# Altium PCB SMD final PCB.PcbDoc
Units mm, origin at the board's own origin, x right, y up, seen from the top; angles counter-clockwise.
Board outline 85 x 85 mm, 2 copper layers (Top Layer, Bottom Layer); 34 components, 28 nets, 140 pads, 61 vias.
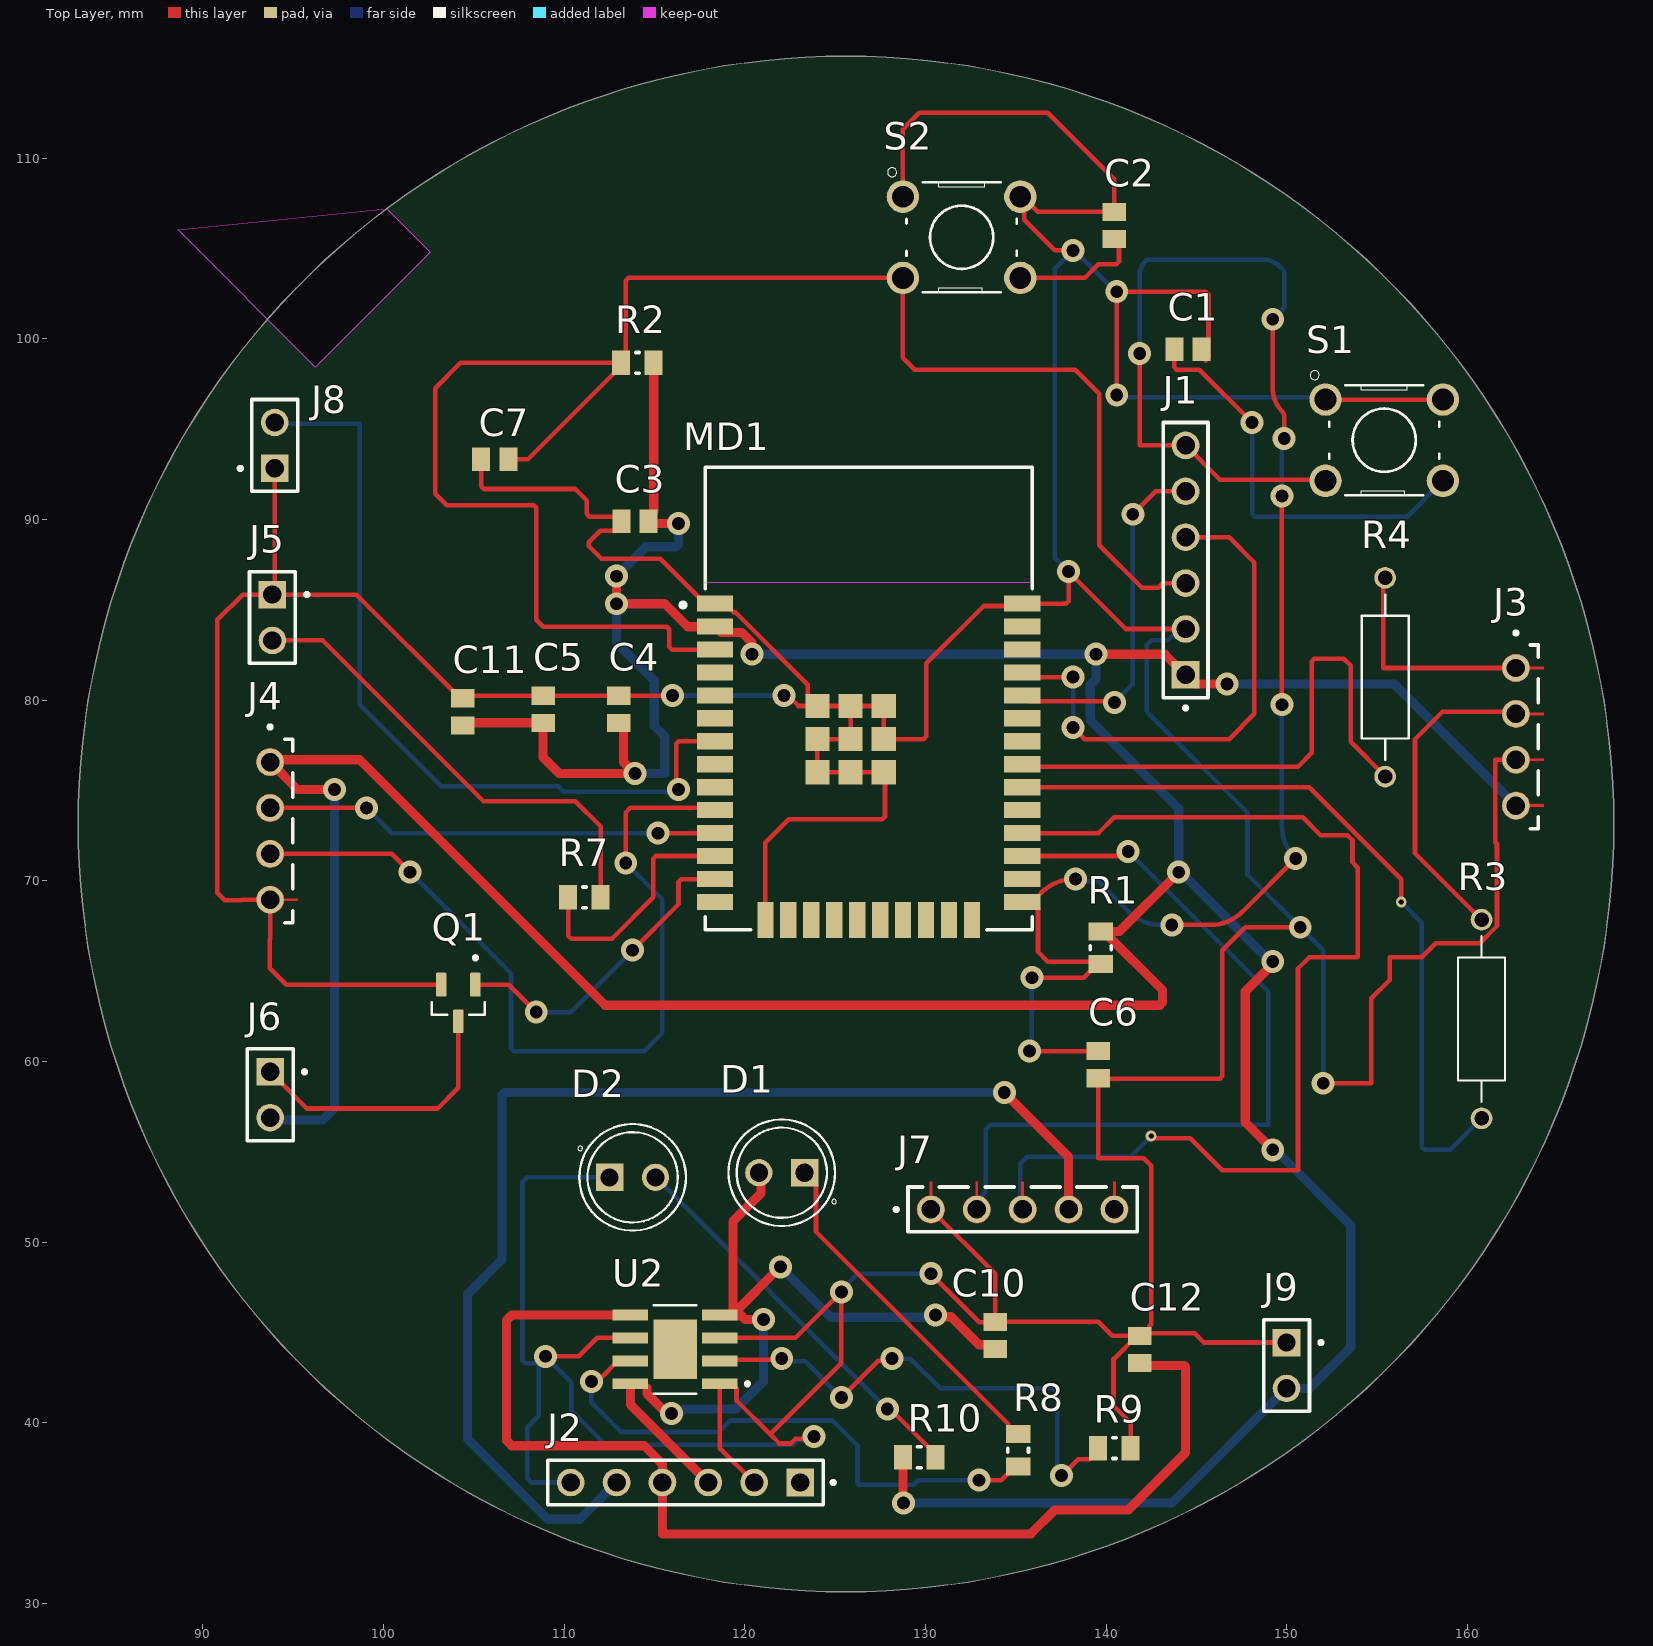
[diagram p0: Top Layer view]
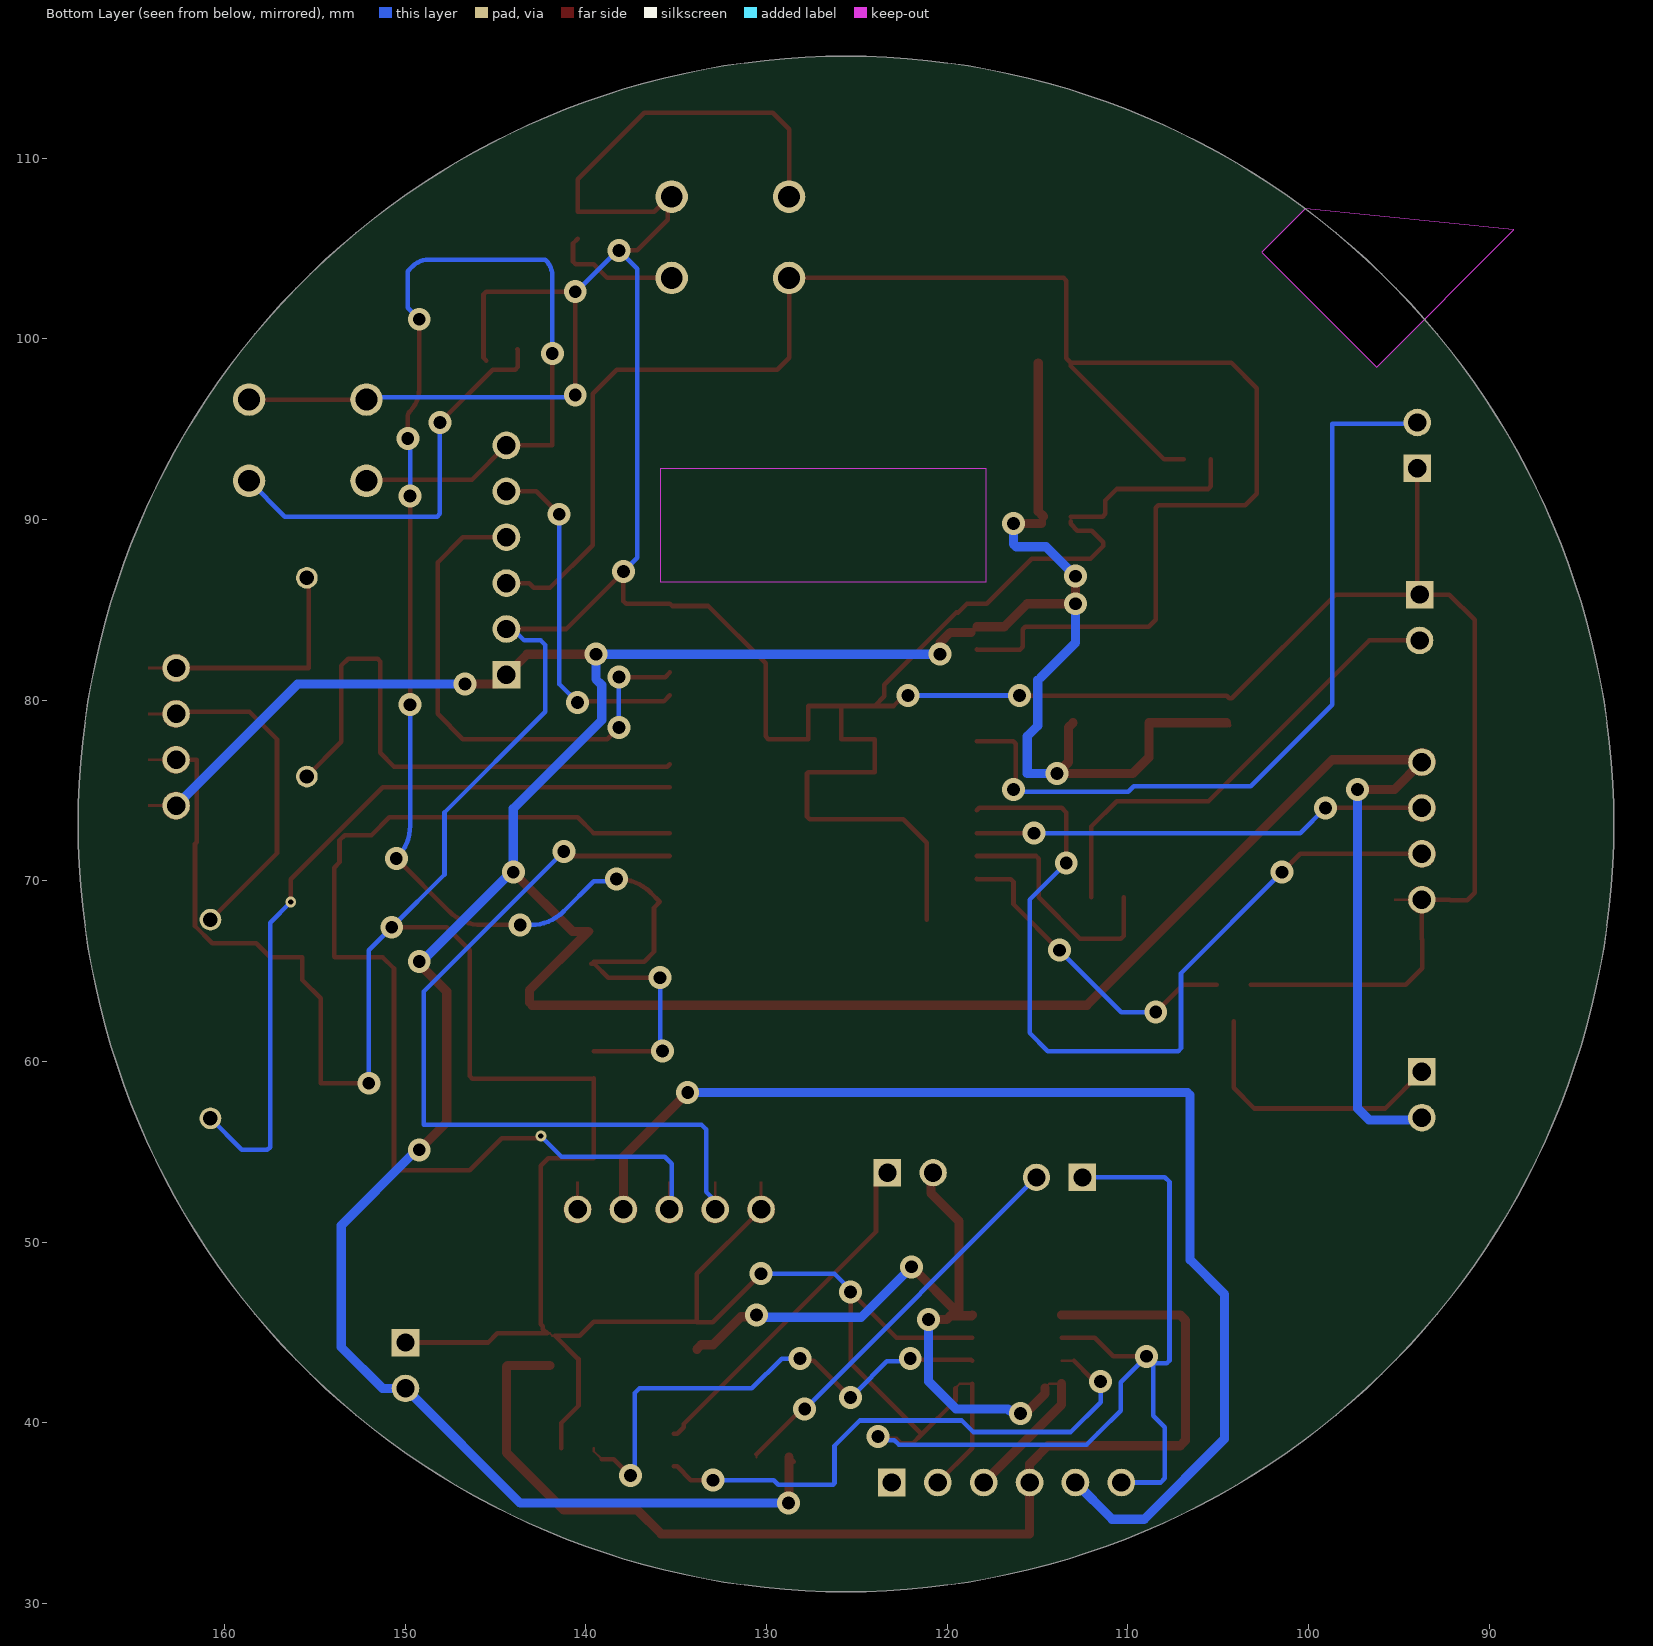
[diagram p1: Bottom Layer view, seen from below]

## Layer stack, top to bottom
Top Solder: solder mask 0.0102, Solder Resist, Dk 3.5
Top Layer: signal copper 0.0356
Dielectric 1: dielectric 0.32, FR-4, Dk 4.8
Bottom Layer: signal copper 0.0356
Bottom Solder: solder mask 0.0102, Solder Resist, Dk 3.5

## Board outline
83.103,73.152 ccw(c125.603,73.152) 125.603,30.652 ccw(c125.603,73.152) 168.103,73.152 ccw(c125.603,73.152) 125.603,115.652 ccw(c125.603,73.152)
cut-out: 88.636,106.035 100.175,107.206 101.346,106.035 102.59,104.791 96.235,98.436

## Design rules (kind name [scope] priority, off if disabled: settings)
BoardOutlineClearance [All] p1: gap=0.2 ignorepadtopadclearanceinfootprint=FALSE
Clearance [All] p1: gap=0.127 ignorepadtopadclearanceinfootprint=FALSE except(0.25: Arc-Hole Track-Hole SMDPad-Hole THPad-Hole Via-Hole Fill-Hole Poly-Hole Region-Hole Text-Hole)
ComponentClearance [All] p1: gap=0.127 collisioncheckmode=3 verticalgap=0.127 showdistances=TRUE
DiffPairsRouting [All] p1: maxlimit=0.254 minlimit=0.127 mostfreqgap=0.127 toplayer_minwidth=0.127 toplayer_maxwidth=25.4 toplayer_prefwidth=0.127 bottomlayer_minwidth=0.127 bottomlayer_maxwidth=25.4 bottomlayer_prefwidth=0.127 maxuncoupledlength=12.7
Height [All] p1: minheight=0 maxheight=1816.048 prefheight=12.7
HoleSize [All] p1: absolutevalues=TRUE maxlimit=6.3 minlimit=0.3 maxpercent=80.000 minpercent=20.000
HoleToHoleClearance [All] p1: gap=0.25 allowstackedmicrovias=FALSE
MinimumAnnularRing [All] p1: minimumring=0.076
MinimumSolderMaskSliver [All] p1: minsoldermaskwidth=0
PlaneClearance [All] p1: clearance=0.127
PlaneConnect PlaneConnectPowerPads [InPadClass('PowerPads')] p1: planeconnectstyle=Direct reliefexpansion=0.508 reliefentries=4 reliefconductorwidth=0.254 reliefairgap=0.254
PlaneConnect [All] p2: pad.planeconnectstyle=Relief pad.reliefexpansion=0.3 pad.reliefentries=4 pad.reliefconductorwidth=0.127 pad.reliefairgap=0.127 via.planeconnectstyle=Direct via.reliefexpansion=0.3 via.reliefentries=4 via.reliefconductorwidth=0.127 via.reliefairgap=0.127
PolygonConnect PolygonConnectPowerPads [All vs (InPadClass('PowerPads'))] p1: connectstyle=Direct reliefconductorwidth=0.254 reliefentries=4 polygonreliefangle="90 Angle" airgapwidth=0.254
PolygonConnect [All] p2: thpad.connectstyle=Relief thpad.reliefconductorwidth=0.127 thpad.reliefentries=4 thpad.polygonreliefangle="90 Angle" thpad.airgapwidth=0.127 smdpad.connectstyle=Relief smdpad.reliefconductorwidth=0.127 smdpad.reliefentries=4 smdpad.polygonreliefangle="90 Angle" smdpad.airgapwidth=0.127 via.connectstyle=Direct via.reliefconductorwidth=0.127 via.reliefentries=4 via.polygonreliefangle="90 Angle" via.airgapwidth=0.127
RoutingVias [All] p1: holewidth=0.3 width=0.6 viastyle="Through Hole" minholewidth=0.3 minwidth=0.6 maxholewidth=0.6 maxwidth=6.6
SilkToSilkClearance [All] p1: silktosilkclearance=0
SilkToSolderMaskClearance [IsPad] p1: minsilkscreentomaskgap=0.127 clearancetoexposedcopper=TRUE
SolderMaskExpansion [All] p1: expansion=0.075 istentingtop=FALSE
Width [All] p1: maxlimit=25.4 minlimit=0.127 preferedwidth=0.127 minimp=50.000000 maximp=50.000000 favimp=50.000000
20 further rules are at their usual default settings.

## Components (designator, comment, footprint, x,y, rotation, side; value= is the part's Value field where it differs from the comment)
C1 "GRM21BR71H104KA01L" CAPC2013X135X45LL10T25 144.538,99.441 r0 top
C2 "GRM21BR71H104KA01L" CAPC2013X135X45LL10T25 140.462,106.287 r90 top
C3 "GRM21BR71H104KA01L" CAPC2013X135X45LL10T25 113.919,89.916 r180 top
C4 "GRM21BR71H104KA01L" CAPC2013X135X45LL10T25 113.03,79.502 r270 top
C5 "GRM21BR71H104KA01L" CAPC2013X135X45LL10T25 108.839,79.502 r270 top
C6 "GRM21BR71H104KA01L" CAPC2013X135X45LL10T25 139.573,59.829 r90 top
C7 "GRM21BR71H104KA01L" CAPC2013X135X45LL10T25 106.16,93.345 r0 top
C10 "GRM21BR71H104KA01L" CAPC2013X135X45LL10T25 133.858,44.831 r90 top
C11 "GRM21BR71H104KA01L" CAPC2013X135X45LL10T25 104.394,79.363 r90 top
C12 "GRM21BR71H104KA01L" CAPC2013X135X45LL10T25 141.859,44.069 r90 top
D1 "WP7113ID" LED_WP7113ID 122.047,53.848 r180 top
D2 "WP7113ID" LED_WP7113ID 113.792,53.594 r0 top
J1 "Boot" SAMTEC_HMTSW-106-X-X-S-X 144.399,87.757 r270 top
J2 "Charging" SAMTEC_HMTSW-106-X-X-S-X 116.713,36.703 r0 top
J3 "MPU-6050" SAMTEC_MTLW-104-X-X-S-X 162.687,77.978 r90 top
J4 "M8N" SAMTEC_MTLW-104-X-X-S-X 93.726,72.771 r90 top
J5 "Limit Switch" SAMTEC_MTSW-101-X-X-D-X 93.853,84.582 r180 top
J6 "Buzzer" SAMTEC_MTSW-101-X-X-D-X 93.726,58.166 r180 top
J7 "MTLW-105-06-T-S-135" SAMTEC_MTLW-105-06-T-S-135 135.382,51.816 r180 top
J8 "MTSW-101-X-X-D-X" SAMTEC_MTSW-101-X-X-D-X 93.98,94.107 r0 top
J9 "MTSW-101-X-X-D-X" SAMTEC_MTSW-101-X-X-D-X 149.987,43.18 r180 top
MD1 "ESP32-WROOM-32D" FP-ESP32-WROOM-32D-MFG 126.857,80.091 r0 top
Q1 "MMBT2222A_RFG" SOT95P237X112-3N 104.14,63.245 r270 top
R1 "RC0805FR-0710KL" RESC2013X60X35NL10T20 139.7,66.305 r90 top
R2 "RC0805FR-0710KL" RESC2013X60X35NL10T20 114.057,98.679 r0 top
R3 "10k" RESAD1100W55L680D260 160.782,62.357 r270 top value=10kR
R4 "10k" RESAD1100W55L680D260 155.448,81.28 r270 top value=10kR
R7 "RC0805FR-0710KL" RESC2013X60X35NL10T20 111.125,69.088 r0 top
R8 "RC0805FR-0710KL" RESC2013X60X35NL10T20 135.128,38.492 r90 top
R9 "RC0805FR-0710KL" RESC2013X60X35NL10T20 140.462,38.608 r180 top
R10 "RC0805FR-0710KL" RESC2013X60X35NL10T20 129.656,38.1 r0 top
S1 "Boot SW" SW_TS-1109 155.396,94.397 r0 top
S2 "Reset Sw" SW_TS-1109 132.005,105.628 r0 top
U2 "TP4056-42-ESOP8" SOIC127P600X175-9N 116.143,44.069 r180 top

## Footprints (in the part's own frame and the unit in brackets; to place one, negate y for a bottom-side part, rotate by r counter-clockwise, add the part's x,y. Pads: shape width x height; smd on the part's side, far side on the other; paste and mask are expansions set on the pad)
CAPC2013X135X45LL10T25 [mm] "Chip Capacitor, 2-Leads, Body 2.00x1.25mm, IPC High Density"
  rect 1x1.3 smd: 1(-0.75,0) 2(0.75,0)
  body extent -1.05,-0.67 1.05,0.68, height 1.35
FP-ESP32-WROOM-32D-MFG [mm]
  rect 2x0.9 smd paste+0 mask+0: 1(-8.5,5.26) 2(-8.5,3.99) 3(-8.5,2.72) 4(-8.5,1.45) 5(-8.5,0.18) 6(-8.5,-1.09) 7(-8.5,-2.36) 8(-8.5,-3.63) 9(-8.5,-4.9) 10(-8.5,-6.17) 11(-8.5,-7.44) 12(-8.5,-8.71) 13(-8.5,-9.98) 14(-8.5,-11.25) 25(8.5,-11.25) 26(8.5,-9.98) 27(8.5,-8.71) 28(8.5,-7.44) 29(8.5,-6.17) 30(8.5,-4.9) 31(8.5,-3.63) 32(8.5,-2.36) 33(8.5,-1.09) 34(8.5,0.18) 35(8.5,1.45) 36(8.5,2.72) 37(8.5,3.99) 38(8.5,5.26)
  rect 0.9x2 smd paste+0 mask+0: 15(-5.715,-12.25) 16(-4.445,-12.25) 17(-3.175,-12.25) 18(-1.905,-12.25) 19(-0.635,-12.25) 20(0.635,-12.25) 21(1.905,-12.25) 22(3.175,-12.25) 23(4.445,-12.25) 24(5.715,-12.25)
  rect 1.33x1.33 smd paste+0 mask+0: 39(-2.835,-4.075) 39(-2.835,-2.24) 39(-2.835,-0.405) 39(-1,-4.075) 39(-1,-2.24) 39(-1,-0.405) 39(0.835,-4.075) 39(0.835,-2.24) 39(0.835,-0.405)
  Keep-Out Layer region: -9,6.45 9,6.45 9,12.75 -9,12.75
  Keep-Out Layer region: -9,6.45 9,6.45 9,12.75 -9,12.75
  silkscreen extent -10.4,-12.8 9.05,12.8, body extent -9.6,-13.35 9.6,12.9, height 0.25
LED_WP7113ID [mm]
  round 1.508 hole 1: A(1.27,0)
  rect 1.508x1.508 / inner round 1.508 / far side rect 1.508x1.508 hole 1: C(-1.27,0)
  silkscreen extent -3.03,-2.95 2.95,2.95, body extent -2.5,-2.95 2.95,2.95, height 9.6
RESAD1100W55L680D260 [mm]
  round 1.2 hole 0.8: 1(-5.5,0) 2(5.5,0)
  silkscreen extent -4.58,-1.3 4.58,1.3, body extent -5.77,-1.2 5.77,1.2, height 2.4
RESC2013X60X35NL10T20 [mm] "Chip Resistor, 2-Leads, Body 2.1x1.35mm, IPC Medium Density"
  rect 1x1.35 smd: 1(-0.9,0) 2(0.9,0)
  silkscreen extent -0.1,-0.58 0.1,0.58, body extent -1.05,-0.68 1.05,0.67, height 0.6
SAMTEC_HMTSW-106-X-X-S-X [mm]
  rect 1.53x1.53 / inner round 1.53 / far side rect 1.53x1.53 hole 1.02: 01(6.35,0)
  round 1.53 hole 1.02: 02(3.81,0) 03(1.27,0) 04(-1.27,0) 05(-3.81,0) 06(-6.35,0)
  silkscreen extent -7.62,-1.24 8.28,1.24
SAMTEC_MTLW-104-X-X-S-X [mm]
  round 1.52 hole 1.02: 01(3.81,0) 02(1.27,0) 03(-1.27,0) 04(-3.81,0)
  Top Layer region: -3.731,0.756 -3.652,0.743 -3.575,0.723 -3.501,0.694 -3.43,0.658 -3.363,0.615 -3.301,0.565 -3.245,0.509 -3.195,0.447 -3.152,0.38 -3.116,0.309 -3.087,0.235 -3.067,0.158 -3.054,0.079 -3.05,0 -3.051,-0.038 -3.054,-0.076 -3.058,-0.113 -3.065,-0.151 -3.073,-0.187 -3.083,-0.224 -3.095,-0.259 -3.109,-0.294 -3.124,-0.329 -3.141,-0.363 -3.16,-0.395 -3.18,-0.427 -3.202,-0.458 -3.225,-0.487 -3.25,-0.516 -3.276,-0.543 -3.304,-0.569 -3.333,-0.593 -3.362,-0.616 -3.393,-0.638 -3.425,-0.658 -3.458,-0.676 -3.492,-0.692 -3.527,-0.707 -3.562,-0.721 -3.598,-0.732 -3.634,-0.742 -3.671,-0.75 -3.708,-0.756 -3.745,-0.76 -3.745,-1.53 -3.875,-1.53 -3.875,-0.76 -3.912,-0.756 -3.949,-0.75 -3.986,-0.742 -4.022,-0.732 -4.058,-0.721 -4.093,-0.707 -4.128,-0.692 -4.162,-0.676 -4.195,-0.658 -4.227,-0.638 -4.258,-0.616 -4.287,-0.593 -4.316,-0.569 -4.344,-0.543 -4.37,-0.516 -4.395,-0.487 -4.418,-0.458 -4.44,-0.427 -4.46,-0.395 -4.479,-0.363 -4.496,-0.329 -4.511,-0.294 -4.525,-0.259 -4.537,-0.224 -4.547,-0.187 -4.555,-0.151 -4.562,-0.113 -4.566,-0.076 -4.569,-0.038 -4.57,0 -4.566,0.079 -4.553,0.158 -4.533,0.235 -4.504,0.309 -4.468,0.38 -4.425,0.447 -4.375,0.509 -4.319,0.565 -4.257,0.615 -4.19,0.658 -4.119,0.694 -4.045,0.723 -3.968,0.743 -3.889,0.756 -3.81,0.76
  Top Layer region: -1.191,0.756 -1.112,0.743 -1.035,0.723 -0.961,0.694 -0.89,0.658 -0.823,0.615 -0.761,0.565 -0.705,0.509 -0.655,0.447 -0.612,0.38 -0.576,0.309 -0.547,0.235 -0.527,0.158 -0.514,0.079 -0.51,0 -0.511,-0.038 -0.514,-0.076 -0.518,-0.113 -0.525,-0.151 -0.533,-0.187 -0.543,-0.224 -0.555,-0.259 -0.569,-0.294 -0.584,-0.329 -0.601,-0.363 -0.62,-0.395 -0.64,-0.427 -0.662,-0.458 -0.685,-0.487 -0.71,-0.516 -0.736,-0.543 -0.764,-0.569 -0.793,-0.593 -0.822,-0.616 -0.853,-0.638 -0.885,-0.658 -0.918,-0.676 -0.952,-0.692 -0.987,-0.707 -1.022,-0.721 -1.058,-0.732 -1.094,-0.742 -1.131,-0.75 -1.168,-0.756 -1.205,-0.76 -1.205,-1.53 -1.335,-1.53 -1.335,-0.76 -1.372,-0.756 -1.409,-0.75 -1.446,-0.742 -1.482,-0.732 -1.518,-0.721 -1.553,-0.707 -1.588,-0.692 -1.622,-0.676 -1.655,-0.658 -1.687,-0.638 -1.718,-0.616 -1.747,-0.593 -1.776,-0.569 -1.804,-0.543 -1.83,-0.516 -1.855,-0.487 -1.878,-0.458 -1.9,-0.427 -1.92,-0.395 -1.939,-0.363 -1.956,-0.329 -1.971,-0.294 -1.985,-0.259 -1.997,-0.224 -2.007,-0.187 -2.015,-0.151 -2.022,-0.113 -2.026,-0.076 -2.029,-0.038 -2.03,0 -2.026,0.079 -2.013,0.158 -1.993,0.235 -1.964,0.309 -1.928,0.38 -1.885,0.447 -1.835,0.509 -1.779,0.565 -1.717,0.615 -1.65,0.658 -1.579,0.694 -1.505,0.723 -1.428,0.743 -1.349,0.756 -1.27,0.76
  Top Layer region: 1.349,0.756 1.428,0.743 1.505,0.723 1.579,0.694 1.65,0.658 1.717,0.615 1.779,0.565 1.835,0.509 1.885,0.447 1.928,0.38 1.964,0.309 1.993,0.235 2.013,0.158 2.026,0.079 2.03,0 2.029,-0.038 2.026,-0.076 2.022,-0.113 2.015,-0.151 2.007,-0.187 1.997,-0.224 1.985,-0.259 1.971,-0.294 1.956,-0.329 1.939,-0.363 1.92,-0.395 1.9,-0.427 1.878,-0.458 1.855,-0.487 1.83,-0.516 1.804,-0.543 1.776,-0.569 1.747,-0.593 1.718,-0.616 1.687,-0.638 1.655,-0.658 1.622,-0.676 1.588,-0.692 1.553,-0.707 1.518,-0.721 1.482,-0.732 1.446,-0.742 1.409,-0.75 1.372,-0.756 1.335,-0.76 1.335,-1.53 1.205,-1.53 1.205,-0.76 1.168,-0.756 1.131,-0.75 1.094,-0.742 1.058,-0.732 1.022,-0.721 0.987,-0.707 0.952,-0.692 0.918,-0.676 0.885,-0.658 0.853,-0.638 0.822,-0.616 0.793,-0.593 0.764,-0.569 0.736,-0.543 0.71,-0.516 0.685,-0.487 0.662,-0.458 0.64,-0.427 0.62,-0.395 0.601,-0.363 0.584,-0.329 0.569,-0.294 0.555,-0.259 0.543,-0.224 0.533,-0.187 0.525,-0.151 0.518,-0.113 0.514,-0.076 0.511,-0.038 0.51,0 0.514,0.079 0.527,0.158 0.547,0.235 0.576,0.309 0.612,0.38 0.655,0.447 0.705,0.509 0.761,0.565 0.823,0.615 0.89,0.658 0.961,0.694 1.035,0.723 1.112,0.743 1.191,0.756 1.27,0.76
  Top Layer region: 3.889,0.756 3.968,0.743 4.045,0.723 4.119,0.694 4.19,0.658 4.257,0.615 4.319,0.565 4.375,0.509 4.425,0.447 4.468,0.38 4.504,0.309 4.533,0.235 4.553,0.158 4.566,0.079 4.57,0 4.569,-0.038 4.566,-0.076 4.562,-0.113 4.555,-0.151 4.547,-0.187 4.537,-0.224 4.525,-0.259 4.511,-0.294 4.496,-0.329 4.479,-0.363 4.46,-0.395 4.44,-0.427 4.418,-0.458 4.395,-0.487 4.37,-0.516 4.344,-0.543 4.316,-0.569 4.287,-0.593 4.258,-0.616 4.227,-0.638 4.195,-0.658 4.162,-0.676 4.128,-0.692 4.093,-0.707 4.058,-0.721 4.022,-0.732 3.986,-0.742 3.949,-0.75 3.912,-0.756 3.875,-0.76 3.875,-1.53 3.745,-1.53 3.745,-0.76 3.708,-0.756 3.671,-0.75 3.634,-0.742 3.598,-0.732 3.562,-0.721 3.527,-0.707 3.492,-0.692 3.458,-0.676 3.425,-0.658 3.393,-0.638 3.362,-0.616 3.333,-0.593 3.304,-0.569 3.276,-0.543 3.25,-0.516 3.225,-0.487 3.202,-0.458 3.18,-0.427 3.16,-0.395 3.141,-0.363 3.124,-0.329 3.109,-0.294 3.095,-0.259 3.083,-0.224 3.073,-0.187 3.065,-0.151 3.058,-0.113 3.054,-0.076 3.051,-0.038 3.05,0 3.054,0.079 3.067,0.158 3.087,0.235 3.116,0.309 3.152,0.38 3.195,0.447 3.245,0.509 3.301,0.565 3.363,0.615 3.43,0.658 3.501,0.694 3.575,0.723 3.652,0.743 3.731,0.756 3.81,0.76
  silkscreen extent -5.08,-1.24 5.85,0.1
SAMTEC_MTLW-105-06-T-S-135 [mm]
  round 1.52 hole 1.02: 01(5.08,0) 02(2.54,0) 03(0,0) 04(-2.54,0) 05(-5.08,0)
  Top Layer region: -5.001,0.756 -4.922,0.743 -4.845,0.723 -4.771,0.694 -4.7,0.658 -4.633,0.615 -4.571,0.565 -4.515,0.509 -4.465,0.447 -4.422,0.38 -4.386,0.309 -4.357,0.235 -4.337,0.158 -4.324,0.079 -4.32,0 -4.321,-0.038 -4.324,-0.076 -4.328,-0.113 -4.335,-0.151 -4.343,-0.187 -4.353,-0.224 -4.365,-0.259 -4.379,-0.294 -4.394,-0.329 -4.411,-0.363 -4.43,-0.395 -4.45,-0.427 -4.472,-0.458 -4.495,-0.487 -4.52,-0.516 -4.546,-0.543 -4.574,-0.569 -4.603,-0.593 -4.632,-0.616 -4.663,-0.638 -4.695,-0.658 -4.728,-0.676 -4.762,-0.692 -4.797,-0.707 -4.832,-0.721 -4.868,-0.732 -4.904,-0.742 -4.941,-0.75 -4.978,-0.756 -5.015,-0.76 -5.015,-1.53 -5.145,-1.53 -5.145,-0.76 -5.182,-0.756 -5.219,-0.75 -5.256,-0.742 -5.292,-0.732 -5.328,-0.721 -5.363,-0.707 -5.398,-0.692 -5.432,-0.676 -5.465,-0.658 -5.497,-0.638 -5.528,-0.616 -5.557,-0.593 -5.586,-0.569 -5.614,-0.543 -5.64,-0.516 -5.665,-0.487 -5.688,-0.458 -5.71,-0.427 -5.73,-0.395 -5.749,-0.363 -5.766,-0.329 -5.781,-0.294 -5.795,-0.259 -5.807,-0.224 -5.817,-0.187 -5.825,-0.151 -5.832,-0.113 -5.836,-0.076 -5.839,-0.038 -5.84,0 -5.836,0.079 -5.823,0.158 -5.803,0.235 -5.774,0.309 -5.738,0.38 -5.695,0.447 -5.645,0.509 -5.589,0.565 -5.527,0.615 -5.46,0.658 -5.389,0.694 -5.315,0.723 -5.238,0.743 -5.159,0.756 -5.08,0.76
  Top Layer region: -2.461,0.756 -2.382,0.743 -2.305,0.723 -2.231,0.694 -2.16,0.658 -2.093,0.615 -2.031,0.565 -1.975,0.509 -1.925,0.447 -1.882,0.38 -1.846,0.309 -1.817,0.235 -1.797,0.158 -1.784,0.079 -1.78,0 -1.781,-0.038 -1.784,-0.076 -1.788,-0.113 -1.795,-0.151 -1.803,-0.187 -1.813,-0.224 -1.825,-0.259 -1.839,-0.294 -1.854,-0.329 -1.871,-0.363 -1.89,-0.395 -1.91,-0.427 -1.932,-0.458 -1.955,-0.487 -1.98,-0.516 -2.006,-0.543 -2.034,-0.569 -2.063,-0.593 -2.092,-0.616 -2.123,-0.638 -2.155,-0.658 -2.188,-0.676 -2.222,-0.692 -2.257,-0.707 -2.292,-0.721 -2.328,-0.732 -2.364,-0.742 -2.401,-0.75 -2.438,-0.756 -2.475,-0.76 -2.475,-1.53 -2.605,-1.53 -2.605,-0.76 -2.642,-0.756 -2.679,-0.75 -2.716,-0.742 -2.752,-0.732 -2.788,-0.721 -2.823,-0.707 -2.858,-0.692 -2.892,-0.676 -2.925,-0.658 -2.957,-0.638 -2.988,-0.616 -3.017,-0.593 -3.046,-0.569 -3.074,-0.543 -3.1,-0.516 -3.125,-0.487 -3.148,-0.458 -3.17,-0.427 -3.19,-0.395 -3.209,-0.363 -3.226,-0.329 -3.241,-0.294 -3.255,-0.259 -3.267,-0.224 -3.277,-0.187 -3.285,-0.151 -3.292,-0.113 -3.296,-0.076 -3.299,-0.038 -3.3,0 -3.296,0.079 -3.283,0.158 -3.263,0.235 -3.234,0.309 -3.198,0.38 -3.155,0.447 -3.105,0.509 -3.049,0.565 -2.987,0.615 -2.92,0.658 -2.849,0.694 -2.775,0.723 -2.698,0.743 -2.619,0.756 -2.54,0.76
  Top Layer region: 0.079,0.756 0.158,0.743 0.235,0.723 0.309,0.694 0.38,0.658 0.447,0.615 0.509,0.565 0.565,0.509 0.615,0.447 0.658,0.38 0.694,0.309 0.723,0.235 0.743,0.158 0.756,0.079 0.76,0 0.759,-0.038 0.756,-0.076 0.752,-0.113 0.745,-0.151 0.737,-0.187 0.727,-0.224 0.715,-0.259 0.701,-0.294 0.686,-0.329 0.669,-0.363 0.65,-0.395 0.63,-0.427 0.608,-0.458 0.585,-0.487 0.56,-0.516 0.534,-0.543 0.506,-0.569 0.477,-0.593 0.448,-0.616 0.417,-0.638 0.385,-0.658 0.352,-0.676 0.318,-0.692 0.283,-0.707 0.248,-0.721 0.212,-0.732 0.176,-0.742 0.139,-0.75 0.102,-0.756 0.065,-0.76 0.065,-1.53 -0.065,-1.53 -0.065,-0.76 -0.102,-0.756 -0.139,-0.75 -0.176,-0.742 -0.212,-0.732 -0.248,-0.721 -0.283,-0.707 -0.318,-0.692 -0.352,-0.676 -0.385,-0.658 -0.417,-0.638 -0.448,-0.616 -0.477,-0.593 -0.506,-0.569 -0.534,-0.543 -0.56,-0.516 -0.585,-0.487 -0.608,-0.458 -0.63,-0.427 -0.65,-0.395 -0.669,-0.363 -0.686,-0.329 -0.701,-0.294 -0.715,-0.259 -0.727,-0.224 -0.737,-0.187 -0.745,-0.151 -0.752,-0.113 -0.756,-0.076 -0.759,-0.038 -0.76,0 -0.756,0.079 -0.743,0.158 -0.723,0.235 -0.694,0.309 -0.658,0.38 -0.615,0.447 -0.565,0.509 -0.509,0.565 -0.447,0.615 -0.38,0.658 -0.309,0.694 -0.235,0.723 -0.158,0.743 -0.079,0.756 0,0.76
  Top Layer region: 2.619,0.756 2.698,0.743 2.775,0.723 2.849,0.694 2.92,0.658 2.987,0.615 3.049,0.565 3.105,0.509 3.155,0.447 3.198,0.38 3.234,0.309 3.263,0.235 3.283,0.158 3.296,0.079 3.3,0 3.299,-0.038 3.296,-0.076 3.292,-0.113 3.285,-0.151 3.277,-0.187 3.267,-0.224 3.255,-0.259 3.241,-0.294 3.226,-0.329 3.209,-0.363 3.19,-0.395 3.17,-0.427 3.148,-0.458 3.125,-0.487 3.1,-0.516 3.074,-0.543 3.046,-0.569 3.017,-0.593 2.988,-0.616 2.957,-0.638 2.925,-0.658 2.892,-0.676 2.858,-0.692 2.823,-0.707 2.788,-0.721 2.752,-0.732 2.716,-0.742 2.679,-0.75 2.642,-0.756 2.605,-0.76 2.605,-1.53 2.475,-1.53 2.475,-0.76 2.438,-0.756 2.401,-0.75 2.364,-0.742 2.328,-0.732 2.292,-0.721 2.257,-0.707 2.222,-0.692 2.188,-0.676 2.155,-0.658 2.123,-0.638 2.092,-0.616 2.063,-0.593 2.034,-0.569 2.006,-0.543 1.98,-0.516 1.955,-0.487 1.932,-0.458 1.91,-0.427 1.89,-0.395 1.871,-0.363 1.854,-0.329 1.839,-0.294 1.825,-0.259 1.813,-0.224 1.803,-0.187 1.795,-0.151 1.788,-0.113 1.784,-0.076 1.781,-0.038 1.78,0 1.784,0.079 1.797,0.158 1.817,0.235 1.846,0.309 1.882,0.38 1.925,0.447 1.975,0.509 2.031,0.565 2.093,0.615 2.16,0.658 2.231,0.694 2.305,0.723 2.382,0.743 2.461,0.756 2.54,0.76
  Top Layer region: 5.159,0.756 5.238,0.743 5.315,0.723 5.389,0.694 5.46,0.658 5.527,0.615 5.589,0.565 5.645,0.509 5.695,0.447 5.738,0.38 5.774,0.309 5.803,0.235 5.823,0.158 5.836,0.079 5.84,0 5.839,-0.038 5.836,-0.076 5.832,-0.113 5.825,-0.151 5.817,-0.187 5.807,-0.224 5.795,-0.259 5.781,-0.294 5.766,-0.329 5.749,-0.363 5.73,-0.395 5.71,-0.427 5.688,-0.458 5.665,-0.487 5.64,-0.516 5.614,-0.543 5.586,-0.569 5.557,-0.593 5.528,-0.616 5.497,-0.638 5.465,-0.658 5.432,-0.676 5.398,-0.692 5.363,-0.707 5.328,-0.721 5.292,-0.732 5.256,-0.742 5.219,-0.75 5.182,-0.756 5.145,-0.76 5.145,-1.53 5.015,-1.53 5.015,-0.76 4.978,-0.756 4.941,-0.75 4.904,-0.742 4.868,-0.732 4.832,-0.721 4.797,-0.707 4.762,-0.692 4.728,-0.676 4.695,-0.658 4.663,-0.638 4.632,-0.616 4.603,-0.593 4.574,-0.569 4.546,-0.543 4.52,-0.516 4.495,-0.487 4.472,-0.458 4.45,-0.427 4.43,-0.395 4.411,-0.363 4.394,-0.329 4.379,-0.294 4.365,-0.259 4.353,-0.224 4.343,-0.187 4.335,-0.151 4.328,-0.113 4.324,-0.076 4.321,-0.038 4.32,0 4.324,0.079 4.337,0.158 4.357,0.235 4.386,0.309 4.422,0.38 4.465,0.447 4.515,0.509 4.571,0.565 4.633,0.615 4.7,0.658 4.771,0.694 4.845,0.723 4.922,0.743 5.001,0.756 5.08,0.76
  silkscreen extent -6.35,-1.24 7.1,1.24
SAMTEC_MTSW-101-X-X-D-X [mil]
  rect 60x60 / inner round 60 / far side rect 60x60 hole 40: 01(0,-50)
  round 60 hole 40: 02(0,50)
  silkscreen extent -79,-100 50,100
SOIC127P600X175-9N [mm]
  rect 1.97x0.6 smd: 1(-2.475,1.905) 2(-2.475,0.635) 3(-2.475,-0.635) 4(-2.475,-1.905) 5(2.475,-1.905) 6(2.475,-0.635) 7(2.475,0.635) 8(2.475,1.905)
  rect 2.413x3.302 smd paste-3: 9(0,0)
  silkscreen extent -4.1,-2.45 1.17,2.45, body extent -3,-2.45 3,2.45, height 1.75
SOT95P237X112-3N [mm]
  rrect25% 1.32x0.59 smd: 1(-1.015,0.95) 2(-1.015,-0.95) 3(1.015,0)
  silkscreen extent -2.6,-1.46 0.65,1.46, body extent -1.19,-1.46 1.19,1.46, height 1.12
SW_TS-1109 [mm]
  round 1.8 hole 1.2: 1(-3.25,2.25) 2(3.25,2.25) 3(-3.25,-2.25) 4(3.25,-2.25)
  silkscreen extent -4.1,-3.05 3.05,3.85

## Part data
C1 C2 C3 C4 C5 C6 C7 C10 C11 C12: library part CMP-2100-03644-1, "Chip Capacitor, 0.1 uF, +/- 10%, 50 V, -55 to 125 degC, 0805 (2012 Metric), RoHS, Tape and Reel", Capacitance=100nF, Case Code (Imperial)=0805, Case Code (Metric)=2012, Dielectric=X7R, Dielectric Material=Ceramic, Insulation Resistance=10GR, Manufacturer=Murata, Max Operating Temperature=125degC, Min Operating Temperature=-55degC, Package Description="2-Pin Surface Mount Device, Body 2 x 1.25 mm", Package Quantity=1, Tolerance=10%, Voltage=50V, Case/Package=0805, Datasheet URL=http://psearch.en.murata.com/capacitor/product/GRM21BR71H104KA01%23.pdf, Datasheet Version=42675.0, Depth=1.25mm, Height=1.25mm, Lead Free=LeadFree, Length=2mm, Manufacturer URL=http://www.murata.com/, Material=Ceramic, Mount=SurfaceMount, Number of Pins=2, Package Reference=0805, Packaging=TapeandReel, Radiation Hardening=No, REACH SVHC=Unknown, RoHSCompliant=true, Termination=SMD/SMT, Thickness=0.053inch, Voltage Rating=50V, Voltage Rating (DC)=50V, Width=0.049inch
D1 D2: "Red 617nm LED Indication - Discrete 2V Radial", Package="Radial Kingbright", Availability="In Stock", Check_prices=https://www.snapeda.com/parts/WP7113ID/Kingbright/view-part/?ref=eda, MF=Kingbright, MP=WP7113ID, Price=None, Purchase-URL=https://pricing.snapeda.com/search/part/WP7113ID/?ref=eda, SnapEDA_Link=https://www.snapeda.com/parts/WP7113ID/Kingbright/view-part/?ref=snap
J1 J2: library part connector, ".100 High-Temp Variable Post Height Terminal Strip", Package=None, Check_prices=https://www.snapeda.com/parts/HMTSW-106-07-T-S-200/Samtec/view-part/?ref=eda, MF=SAMTEC, MP=HMTSW-106-07-T-S-200, SnapEDA_Link=https://www.snapeda.com/parts/HMTSW-106-07-T-S-200/Samtec/view-part/?ref=snap
J3 J4: library part MTLW-104-X-X-S-X, Package=None, Availability=Unavailable, MF="{'manufacturer': u'Samtec Inc.'}", MP=MTLW-104-X-X-S-X, Price=None
J5 J6: library part MTSW-101-X-X-D-X, "Variable Height PCB Header Strips, 0.100 pitch", Package=None, Check_prices=https://www.snapeda.com/parts/MTSW-101-09-L-D-210/Samtec/view-part/?ref=eda, MF=SAMTEC, MP=MTSW-101-09-L-D-210, SnapEDA_Link=https://www.snapeda.com/parts/MTSW-101-09-L-D-210/Samtec/view-part/?ref=snap
J7: Package=None, Availability=Unavailable, MP=MTLW-105-06-T-S-135, Price=None
J8 J9: "Variable Height PCB Header Strips, 0.100 pitch", Package=None, Check_prices=https://www.snapeda.com/parts/MTSW-101-09-L-D-210/Samtec/view-part/?ref=eda, MF=SAMTEC, MP=MTSW-101-09-L-D-210, SnapEDA_Link=https://www.snapeda.com/parts/MTSW-101-09-L-D-210/Samtec/view-part/?ref=snap
MD1: library part esp32wroom32d, "WIFI MODULE 32MBITS SPI FLASH", Manufacturer="Espressif Systems", Max Frequency=2484MHz, Max Supply Voltage=3.6V, Min Supply Voltage=3V, Nominal Supply Current=500mA, Temperature="-40°C to +85°C", Temperature Range High=+85°C, Temperature Range Low=-40°C, Automotive=No, Bandwidth=72MHz, Category=UNK, ComponentLink2Description=Datasheet, ComponentLink2URL=https://www.espressif.com/sites/default/files/documentation/esp32-wroom-32d_esp32-wroom-32u_datasheet_en.pdf, Data Rate=150Mbits/s, Device Class L1="Integrated Circuits (ICs)", Device Class L2="RF Semiconductors and Devices", Device Class L3=Transceivers, Digikey Description="WIFI MODULE 32MBITS SPI FLASH", Height=3.2mm, Interface=I2C,SPI,UART,Ethernet,I2S,Other, Lead Free=Yes, Manufacturer Part Number=ESP32-WROOM-32D, Mouser Description="Wi-Fi/BT BLE Module ESP32-D0WD, SPI Flash, UART, P", Number Of Adc Channels=16, Number Of Gpio=32, Octopart=https://octopart.com/esp32-wroom-32d-espressif+systems-91040050, Package=ESP32-WROOM-32D, RoHS=TRUE, Sensitivity=-98dBm
Q1: "SOT-23, 75V, 0.6A, NPN Transistor", Package="SOT-23 Taiwan Semiconductor", Check_prices=https://www.snapeda.com/parts/MMBT2222A%20RFG/Taiwan+Semiconductor/view-part/?ref=eda, MF="Taiwan Semiconductor", MP="MMBT2222A RFG", SnapEDA_Link=https://www.snapeda.com/parts/MMBT2222A%20RFG/Taiwan+Semiconductor/view-part/?ref=snap
R1 R2 R7 R8 R9 R10: library part CMP-1659-00013-4, "Chip Resistor, 10 KOhm, +/- 1%, 0.125 W, -55 to 155 degC, 0805 (2012 Metric), RoHS, Tape and Reel", Manufacturer=Yageo, Max Operating Temperature="155 degC", Min Operating Temperature="-55 degC", Package Quantity=5000, Voltage Rating="150 V", ComponentLink1Description="Manufacturer URL", ComponentLink1URL=http://www.yageo.com/, ComponentLink2Description=Datasheet, ComponentLink2URL=http://www.yageo.com/documents/recent/PYu-RC_Group_51_RoHS_L_04.pdf, DatasheetVersion="Rev. 4, 02/2016", Height="0.5 mm", Length="2 mm", Mount="Surface Mount", Mounting Technology="Surface Mount", PackageDescription="2-Pin Surface Mounted Device, Body 2 x 1.25 mm", PackageReference=0805, Packaging="Tape and Reel", Pins=2, REACH SVHC="No SVHC", RoHSCompliant=true
R3 R4: "Fixed Resistor, Carbon Film, 0.25W, 10000ohm, 250V, 5% +/-Tol, -500,350ppm/Cel, Through Hole Mount", Manufacturer=Yageo, Manufacturer Part Number=CFR-25JR-52-10K, Max Operating Temperature=155°C, Min Operating Temperature=-55°C, Package Length=6.3mm, Package Shape=Tubular, Package Style=AXIAL, Power=250mW, Rated Temperature=70°C, Resistor Type="FIXED RESISTOR", Supplier Part Number=3706249, Temperature Coefficient (ppm/Cel)=500, Tolerance=5%, Working Voltage=250V, Category="Through-Hole Resistors", ComponentLink1Description=https://datasheet.ciiva.com:443/pdfs/VipMasterIC/IC/YAGO/YAGO-S-A0009358724/YAGO-S-A0009358724-1.pdf?src-supplier=IHS+Markit, ComponentLink1URL=https://datasheet.ciiva.com:443/pdfs/VipMasterIC/IC/YAGO/YAGO-S-A0009358724/YAGO-S-A0009358724-1.pdf?src-supplier=IHS+Markit, ComponentLink2Description=http://www.mouser.com/ds/2/447/Yageo%20LR_CFR_2013-595289.pdf?src-supplier=Mouser, ComponentLink2URL=http://www.mouser.com/ds/2/447/Yageo%20LR_CFR_2013-595289.pdf?src-supplier=Mouser, ComponentLink3Description=http://www.yageo.com/documents/recent/Yageo%20LR_CFR_2013.pdf?src-supplier=Digikey, ComponentLink3URL=http://www.yageo.com/documents/recent/Yageo%20LR_CFR_2013.pdf?src-supplier=Digikey, ComponentLink4Description=http://www.yageo.com/documents/recent/Yageo%20LR_CFR_2013.pdf?src-supplier=Avnet, ComponentLink4URL=http://www.yageo.com/documents/recent/Yageo%20LR_CFR_2013.pdf?src-supplier=Avnet, ComponentLink5Description=https://datasheet.octopart.com/CFR-25JR-52-10K-Yageo-datasheet-155367611.pdf?src-supplier=Newark, ComponentLink5URL=https://datasheet.octopart.com/CFR-25JR-52-10K-Yageo-datasheet-155367611.pdf?src-supplier=Newark, ComponentLink6Description=http://www.yageo.com/documents/recent/General%20Type_CFR.pdf?src-supplier=Future+Electronics, ComponentLink6URL=http://www.yageo.com/documents/recent/General%20Type_CFR.pdf?src-supplier=Future+Electronics, ComponentLink7Description=https://datasheet.octopart.com/CFR-25JR-52-10K-Yageo-datasheet-137875058.pdf?src-supplier=Future+Electronics, ComponentLink7URL=https://datasheet.octopart.com/CFR-25JR-52-10K-Yageo-datasheet-137875058.pdf?src-supplier=Future+Electronics, Construction=Cylindrical, JESD-609 Code=e3, Lead Diameter=0.55mm, Mounting Technology="Through Hole", Packaging="Tape and Reel", Pins=2, Pricing="5000=0.0065, 15000=0.0063, 20000=0.0063, 50000=0.0061, 75000=0.006 (USD)", Reach SVHC Compliant=Yes, RoHS=Yes, RoHS Compliant=Yes, Stock=15000, Supplier="Future Electronics", Technology="CARBON FILM", Terminal Finish=Tin, Termination=Wire
S1 S2: library part Sw, "Heat Sink Full Brick DC/DC Converter Aluminum Top Mount", Package=None, Availability=Unavailable, MF="Samtec Inc.", MP=TS-1109, Price=None, SnapEDA_Link=https://www.snapeda.com/parts/TS-1109/Samtec%20Inc./view-part/106451/?ref=snap
U2: "TP4056-42-ESOP8 TP", Package=None, Check_prices=https://www.snapeda.com/parts/TP4056-42-ESOP8/Lite-On/view-part/?ref=eda, MF="Lite-On Semiconductor", MP=TP4056-42-ESOP8, SnapEDA_Link=https://www.snapeda.com/parts/TP4056-42-ESOP8/Lite-On/view-part/?ref=snap

## Via types
v1: diameter 1.27, hole 0.711, Top Layer to Bottom Layer, 59 vias
v2: diameter 0.6, hole 0.3, Top Layer to Bottom Layer, 2 vias

## Nets (pads, with @x,y where several pads share a name; then routed paths per layer and width w, separated by ;. In a path a pad name is that pad's centre, name@x,y a point inside that pad or via, vN(x,y) a via of type N, cw(c..) or ccw(c..) an arc to the next point about the centre after c; other vN are vias at no path point)
3V3: C3.1 C4.2 C5.2 C11.1 J1.01 J3.04 J4.01 J6.02 J9.02 MD1.2 R1.2 R2.2 R10.1 | length 267.4
  Top Layer w0.127: v1@128.756,35.582 v1(128.778,35.56)
  Top Layer w0.254: J4.01 J4.01@93.853,76.708 ; C11.1 C11.1@104.533,78.752 ; C3.1 C3.1@114.796,89.789 ; MD1.2@118.35,84.074 MD1.2 MD1.2@118.68,83.758 ; R10.1@128.502,37.846 R10.1 ; R1.2 R1.2@139.875,67.205 ; 142.98,63.119 143.129,63.268 ; J1.01 J1.01@144.907,80.899
  Top Layer w0.508: J4.01 95.25,75.057 v1(97.282,75.057) ; J4.01@93.853,76.708 98.679,76.708 112.268,63.119 142.98,63.119 ; C11.1@104.533,78.752 C5.2 108.839,76.835 109.728,75.946 v1(113.919,75.946) 113.284,76.581 113.284,78.498 C4.2 ; v1(112.903,86.868) v1(112.903,85.344) 115.57,85.344 116.84,84.074 MD1.2@118.35,84.074 ; C3.1@114.669,90.17 114.957,90.458 R2.2 ; C3.1@114.796,89.789 v1(116.332,89.789) ; MD1.2@118.68,83.758 119.823,83.758 120.396,83.185 v1(120.396,82.55) ; v1@128.756,35.582 R10.1 ; v1(139.446,82.55) 143.256,82.55 J1.01 ; 143.129,63.268 143.129,63.951 139.875,67.205 140.738,67.205 v1(144.018,70.485) ; J1.01@144.907,80.899 v1(146.685,80.899) ; v1@149.098,65.278 147.701,63.881 147.701,56.642 v1(149.225,55.118)
  Bottom Layer w0.127: v1(144.018,70.485) v1@144.145,70.485 ; v1@149.098,65.532 v1(149.225,65.532)
  Bottom Layer w0.254: J6.02 J6.02@93.853,56.769 ; 114.808,81.28 114.84,81.28 114.989,81.131
  Bottom Layer w0.508: J6.02@93.853,56.769 96.647,56.769 97.282,57.404 v1(97.282,75.057) ; v1(112.903,85.344) 112.903,83.185 114.808,81.28 ; v1(112.903,86.868) 114.532,88.497 116.183,88.497 116.332,88.646 v1(116.332,89.789) ; v1(113.919,75.946) 115.57,75.946 115.57,78.014 114.989,78.595 114.989,81.131 ; v1(120.396,82.55) v1(139.446,82.55) 139.446,81.17 139.119,80.843 139.119,78.903 144.018,74.004 v1(144.018,70.485) ; v1(128.778,35.56) 143.637,35.56 J9.02 151.257,41.91 153.543,44.196 153.543,50.927 v1@149.606,54.864 ; v1@144.145,70.485 v1@149.098,65.532 ; v1(146.685,80.899) 155.956,80.899 J3.04
5V: C10.1 D1.A J2.03 U2.4 U2.8 | length 47.7
  Top Layer w0.127: U2.8 114.353,42.164 U2.8@114.59,41.928
  Top Layer w0.254: D1.A D1.A@120.896,53.729
  Top Layer w0.508: U2.8 113.668,41.018 J2.03 ; U2.8@114.59,41.928 114.59,41.62 v1@115.697,40.513 ; U2.4 118.664,45.928 119.822,45.928 120.03,45.72 v1(121.031,45.72) ; D1.A@120.896,53.729 120.896,52.713 119.349,51.166 119.349,46.02 v1(121.97,48.641) ; v1(130.556,45.974) 130.655,45.875 131.417,45.875 132.965,44.327 133.612,44.327 C10.1
  Bottom Layer w0.508: v1(115.951,40.513) 116.097,40.659 116.521,40.659 116.63,40.767 119.507,40.767 121.031,42.291 v1(121.031,45.72) ; v1(121.97,48.641) 124.764,45.847 v1@130.302,45.847
B2_+: C12.1 J2.04 U2.5 | length 65
  Top Layer w0.127: 115.443,33.856 115.517,33.782 ; C12.1 C12.1@141.998,43.18 ; 144.325,43.18 144.399,43.106
  Top Layer w0.508: U2.5 107.105,45.974 106.807,45.676 106.807,39.033 107.105,38.735 114.427,38.735 115.443,37.719 J2.04 115.443,33.856 135.837,33.856 137.16,35.179 141.224,35.179 144.399,38.354 144.399,43.106 ; C12.1@141.998,43.18 144.325,43.18
Boot: C6.2 J1.06 MD1.25 R1.1 S1.3 | length 98.1
  Top Layer w0.127: v1@138.222,70.104 v1(138.303,70.104)
  Top Layer w0.254: v1(135.763,60.579) C6.2 ; v1(135.89,64.643) 138.763,64.643 139.525,65.405 R1.1 ; v1@138.222,70.104 ccw(c138.222,67.564) 136.426,69.36 135.907,68.841 136.23,68.518 136.23,66.081 136.779,65.532 R1.1@139.573,65.532 ; v1(141.859,99.187) 141.859,94.107 J1.06 146.304,92.202 152.091,92.202 S1.3 ; v1(143.637,67.564) 145.76,67.564 ccw(c145.76,70.104) 147.556,68.308 v1(150.495,71.247) ; v1(149.225,101.092) 149.225,97.238 ccw(c150.959,97.238) 149.733,96.012 cw(c149.426,95.705) 149.86,95.705 v1(149.86,94.488) ; v1(149.733,79.756) v1(149.733,91.313)
  Bottom Layer w0.127: v1(138.303,70.104) ccw(c138.61,70.411) v1@138.61,69.977 ; v1@143.038,67.564 v1(143.637,67.564) ; v1@149.606,79.756 v1(149.733,79.756) ; v1@149.733,94.181 cw(c150.167,94.181) v1(149.86,94.488) ; v1@150.477,71.265 v1(150.495,71.247)
  Bottom Layer w0.254: v1(135.763,60.579) 135.89,60.706 v1(135.89,64.643) ; v1@138.61,69.977 139.573,69.977 141.242,68.308 ccw(c143.038,70.104) v1@143.038,67.564 ; v1(141.859,99.187) 141.859,103.474 cw(c143.16,103.474) 142.24,104.394 148.686,104.394 cw(c148.686,103.093) 149.606,104.013 149.86,103.759 149.86,101.727 v1(149.225,101.092) ; v1(149.733,79.756) 149.733,73.061 ccw(c152.273,73.061) v1@150.477,71.265 ; v1@149.733,91.694 v1@149.733,94.181
Buzzer_-: J6.01 Q1.3 | length 15.4
  Top Layer w0.254: J6.01 95.758,57.404 102.997,57.404 104.14,58.547 Q1.3
EN: C7.2 J1.03 MD1.3 R2.1 S2.3 | length 98.9
  Top Layer w0.254: C7.2 107.998,93.345 113.157,98.504 R2.1 ; MD1.3 118.35,82.804 115.973,82.804 115.824,82.953 115.824,83.925 115.675,84.074 108.839,84.074 108.458,84.455 108.458,90.656 108.309,90.805 103.505,90.805 102.87,91.44 102.87,97.282 104.267,98.679 R2.1 ; J1.03 143.147,86.487 142.893,86.233 141.986,86.233 139.627,88.592 139.627,96.974 138.303,98.298 129.413,98.298 128.755,98.956 S2.3 113.56,103.378 113.411,103.229 113.411,98.933 R2.1
GND: C1.2 C2.2 C3.2 C4.1 C5.1 C6.1 C7.1 C10.2 C11.2 C12.2 D2.C J1.02 J2.02 J2.06 J3.03 J4.04 J5.01 J7.01 J8.01 J9.01 MD1.1 MD1.15 MD1.38 MD1.39 Q1.2 R9.1 S1.1 S1.2 S2.1 S2.2 U2.1 U2.3 U2.6 | length 457.3
  Top Layer w0.127: U2.1 119.303,42.164 U2.1@119.54,41.928 ; C10.2 C10.2@133.87,45.593 ; 140.409,43.561 140.451,43.561 ; C12.2@141.709,44.819 C12.2 141.998,44.958 C12.2@142.148,44.958
  Top Layer w0.254: J8.01 93.98,85.979 J5.01 ; Q1.2 94.617,64.26 93.704,65.173 93.704,66.764 93.726,66.785 J4.04 92.185,68.961 92.164,68.939 91.208,68.939 90.805,69.342 90.805,84.455 92.202,85.852 J5.01 ; C7.1 105.41,91.843 105.559,91.694 110.617,91.694 111.252,91.059 111.252,90.319 111.401,90.17 C3.2@113.169,90.17 ; v1(108.966,43.688) 110.818,43.688 111.834,44.704 U2.6 ; C3.2 113.169,89.766 112.796,89.393 111.999,89.393 111.357,88.751 111.357,88.541 112.068,87.83 115.328,87.83 117.807,85.351 MD1.1 118.907,85.351 119.4,84.858 119.492,84.858 123.484,80.866 123.484,80.224 MD1.39@124.022,79.686 ; v1(116.005,80.264) 115.993,80.252 C4.1 C5.1 104.533,80.252 C11.2 104.244,80.113 98.505,85.852 J5.01 ; U2.1 118.618,38.608 J2.02 ; U2.3 122.809,44.704 v1(125.349,47.244) 125.349,43.307 121.412,39.37 ; U2.1@119.54,41.928 119.54,41.242 121.412,39.37 ; MD1.15 121.142,72.12 122.428,73.406 127.613,73.406 127.762,73.555 127.762,75.946 127.692,76.016 125.857,76.016 124.022,76.016 124.022,77.851 125.857,77.851 MD1.39@125.857,79.686 ; v1(122.174,80.264) 122.398,80.264 122.976,79.686 MD1.39@124.022,79.686 ; v1(123.825,39.243) 123.708,39.126 122.809,39.126 122.545,38.862 121.92,38.862 121.412,39.37 ; S2.1 128.755,111.61 129.667,112.522 136.779,112.522 140.462,108.839 C2.2 136.226,107.037 135.385,107.878 S2.2 135.465,107.668 135.465,106.597 137.16,104.902 v1(138.176,104.902) ; v1(130.302,48.26) 132.981,45.581 C10.2 133.858,48.26 J7.01 ; C10.2@133.87,45.593 139.573,45.593 140.347,44.819 141.709,44.819 140.451,43.561 ; 140.409,43.561 140.409,40.947 141.362,39.994 R9.1 ; v1(140.589,96.901) v1(140.589,102.616) 145.52,102.616 145.669,102.467 145.669,98.957 C1.2@145.518,98.806 ; J1.02 141.097,83.947 v1(137.922,87.122) 137.922,85.493 137.773,85.344 135.364,85.344 MD1.38 135.223,85.217 133.223,85.217 130.048,82.042 130.048,78 129.899,77.851 127.692,77.851 127.692,79.686 MD1.39@125.857,79.686 ; J9.01 145.415,44.45 144.907,44.958 142.148,44.958 142.382,45.192 142.382,45.342 142.494,45.454 142.494,54.229 142.076,54.647 139.573,54.647 C6.1 139.597,59.055 146.282,59.055 146.431,59.204 146.431,66.167 147.701,67.437 v1(150.749,67.437) ; v1(152.019,58.801) 154.686,58.801 154.686,63.5 155.702,64.516 155.702,65.786 157.48,65.786 158.242,66.548 160.681,66.548 161.636,67.503 161.636,72.061 161.55,72.147 161.55,76.705 162.684,76.705 J3.03 ; S1.1 S1.2 ; MD1.39@124.022,79.686 MD1.39@125.857,79.686
  Bottom Layer w0.127: 111.633,39.444 111.707,39.37
  Bottom Layer w0.254: J2.06 108.189,36.703 107.95,36.942 107.95,39.762 108.585,40.397 v1@108.585,43.307 ; 111.633,39.444 110.397,40.681 110.397,42.257 v1(108.966,43.688) v1@108.585,43.307 ; 111.707,39.37 112.275,38.802 122.682,38.802 122.928,39.049 123.631,39.049 v1(123.825,39.243) ; D2.C 107.95,53.594 107.696,53.34 107.696,43.456 107.845,43.307 v1@108.585,43.307 ; v1(116.005,80.264) v1(122.174,80.264) ; v1@125.476,47.498 126.238,48.26 v1(130.302,48.26) ; v1(137.922,87.122) 137.16,87.884 137.16,103.886 v1(138.176,104.902) 138.239,104.902 140.525,102.616 v1(140.589,102.616) ; v1(140.589,96.901) 140.716,96.774 152.019,96.774 S1.1 ; J1.02 144.054,83.947 143.419,83.312 142.494,83.312 142.24,83.058 142.24,79.375 147.828,73.787 147.828,70.358 v1(150.749,67.437) 152.019,66.167 v1(152.019,58.801)
Limit_+: J5.02 R7.2 | length 26.4
  Top Layer w0.254: J5.02 96.647,83.312 105.537,74.422 110.617,74.422 112.025,73.014 R7.2
NetC1_1: C1.1 S1.4 | length 23.1
  Top Layer w0.254: C1.1 143.764,99.417 143.764,98.447 143.913,98.298 145.161,98.298 v1(148.082,95.377)
  Bottom Layer w0.254: v1(148.082,95.377) 148.082,90.319 148.231,90.17 156.669,90.17 S1.4
NetC2_1: C2.1 S2.4 | length 7.2
  Top Layer w0.254: S2.4 138.811,103.378 139.573,104.14 140.567,104.14 140.716,104.289 140.716,105.283 C2.1
NetD1_C: D1.C R8.2 | length 19.5
  Top Layer w0.254: D1.C 123.944,53.221 123.944,50.576 134.58,39.94 134.58,39.765 134.953,39.392 R8.2
NetD2_A: D2.A R10.2 | length 22
  Top Layer w0.127: R10.2 R10.2@130.556,38.275
  Top Layer w0.254: v1(127.889,40.767) 128.064,40.767 R10.2@130.556,38.275
  Bottom Layer w0.254: D2.A v1(127.889,40.767)
NetMD1_12: MD1.12 R7.1 | length 13.5
  Top Layer w0.254: R7.1 110.236,69.077 110.236,66.951 110.385,66.802 112.649,66.802 114.935,69.088 114.935,71.232 115.084,71.381 MD1.12
NetMD1_13: MD1.13 Q1.1 | length 17.7
  Top Layer w0.254: Q1.1 106.936,64.26 v1(108.458,62.738) ; v1(113.792,66.167) 116.332,68.707 116.332,69.955 116.481,70.104 118.35,70.104 MD1.13
  Bottom Layer w0.254: v1(108.458,62.738) 110.363,62.738 v1(113.792,66.167)
NetMD1_30: MD1.30 R3.2 | length 42.5
  Top Layer w0.254: MD1.30 150.742,75.191 150.749,75.184 151.246,75.184 156.337,70.093 v2(156.337,68.834)
  Bottom Layer w0.254: v2(156.337,68.834) 157.48,67.691 157.48,55.267 157.629,55.118 159.043,55.118 R3.2
NetMD1_31: MD1.31 R4.2 | length 30.8
  Top Layer w0.254: MD1.31 135.491,76.327 150.622,76.327 151.384,77.089 151.384,82.147 151.533,82.296 153.159,82.296 153.532,81.923 153.532,77.696 R4.2
NetR8_1: R8.1 U2.7 | length 31.5
  Top Layer w0.127: v1(111.506,42.291) 111.725,42.51 v1@112.059,42.51 ; U2.7@112.983,43.434 U2.7
  Top Layer w0.254: v1@112.059,42.51 U2.7@112.983,43.434 ; v1(132.969,36.83) 134.191,36.83 134.953,37.592 R8.1
  Bottom Layer w0.254: v1(111.506,42.291) 111.506,41.148 113.157,39.497 118.554,39.497 119.189,40.132 124.841,40.132 126.238,38.735 126.238,36.65 126.312,36.576 129.359,36.576 129.613,36.83 v1(132.969,36.83)
NetR9_2: R9.2 U2.2 | length 28.1
  Top Layer w0.127: R9.2@139.126,37.997 139.562,38.433 R9.2
  Top Layer w0.254: U2.2 118.681,43.497 121.983,43.497 v1(122.047,43.561) ; v1(125.349,41.402) 127.381,43.434 v1@127.889,43.434 ; v1(137.541,37.084) 138.454,37.997 R9.2@139.126,37.997
  Bottom Layer w0.254: v1(122.047,43.561) 122.195,43.413 123.338,43.413 125.017,41.734 125.017,41.705 v1@124.968,41.656 ; v1(128.143,43.561) 129.159,43.561 130.81,41.91 137.033,41.91 137.287,41.656 v1@137.287,36.957
"reset sw": J8.02 MD1.7 | length 44.8
  Top Layer w0.254: v1(116.332,75.057) 116.205,75.184 116.205,77.597 116.339,77.731 MD1.7
  Bottom Layer w0.254: J8.02 94.054,95.303 98.679,95.303 98.679,79.756 103.198,75.237 109.675,75.237 109.982,74.93 116.205,74.93 v1(116.332,75.057)
RX_ESP: J1.04 MD1.35 | length 29.4
  Top Layer w0.254: MD1.35 135.618,81.28 v1(138.176,81.28) ; v1(138.176,78.486) 138.811,77.851 146.812,77.851 148.209,79.248 148.209,87.63 146.812,89.027 J1.04
  Bottom Layer w0.254: v1(138.176,78.486) v1(138.176,81.28)
RX_GSM: J7.03 MD1.28 | length 59.8
  Top Layer w0.254: MD1.28 139.58,72.651 140.462,73.533 150.876,73.533 151.87,72.539 153.352,72.539 153.638,72.253 153.638,71.025 153.924,70.739 153.924,65.808 153.902,65.786 151.257,65.786 150.622,65.151 150.622,53.975 146.431,53.975 144.653,55.753 142.621,55.753 v2(142.494,55.88)
  Bottom Layer w0.254: J7.03@135.255,51.816 135.255,54.356 135.636,54.737 141.351,54.737 v2(142.494,55.88)
RX_M8N: J4.02 MD1.11 | length 25.2
  Top Layer w0.254: J4.02 v1(99.06,74.041) ; v1(115.189,72.644) 115.196,72.651 MD1.11
  Bottom Layer w0.254: v1(99.06,74.041) 100.457,72.644 v1(115.189,72.644)
SCL: J3.02 R3.1 | length 17.8
  Top Layer w0.254: R3.1 157.099,71.54 157.099,77.851 158.623,79.375 162.56,79.375 J3.02
SDA: J3.01 R4.1 | length 12.4
  Top Layer w0.254: R4.1 155.332,86.664 155.332,81.788 J3.01
TX_ESP: J1.05 MD1.34 | length 19.5
  Top Layer w0.254: MD1.34 135.68,79.948 140.397,79.948 v1(140.462,79.883) ; v1(141.478,90.297) 142.748,91.567 J1.05
  Bottom Layer w0.254: v1(140.462,79.883) 141.478,80.899 v1(141.478,90.297)
TX_GSM: J7.02 MD1.27 | length 44.7
  Top Layer w0.254: MD1.27 140.977,71.381 v1(141.224,71.628)
  Bottom Layer w0.254: J7.02@132.715,51.816 132.715,52.159 133.35,52.794 133.35,56.261 133.604,56.515 148.971,56.515 148.971,63.881 v1(141.224,71.628)
TX_M8N: J4.03 MD1.10 | length 47.2
  Top Layer w0.254: J4.03 100.457,71.501 v1(101.473,70.485) ; v1(113.411,70.993) 113.411,73.787 113.665,74.041 118.237,74.041 MD1.10
  Bottom Layer w0.254: v1(101.473,70.485) 107.061,64.897 107.061,60.728 107.21,60.579 114.427,60.579 115.443,61.595 115.443,68.961 v1(113.411,70.993)
Vout_buck: J2.05 J7.04 | length 66.6
  Top Layer w0.508: v1(134.366,58.293) 137.922,54.737 J7.04
  Bottom Layer w0.254: 106.553,58.144 106.702,58.293
  Bottom Layer w0.508: 106.553,58.144 106.553,49.022 104.648,47.117 104.648,39.116 109.093,34.671 110.871,34.671 J2.05 ; 106.702,58.293 v1(134.366,58.293)
pads on no net: J2.01 J7.05 MD1.4 MD1.5 MD1.6 MD1.8 MD1.9 MD1.14 MD1.16 MD1.17 MD1.18 MD1.19 MD1.20 MD1.21 MD1.22 MD1.23 MD1.24 MD1.26 MD1.29 MD1.32 MD1.33 MD1.36 MD1.37 U2.9